# Altium PCB DSP6748_F.PcbDoc (part 9 of 16)
Units mil, origin at the board's own origin, x right, y up, seen from the top; angles counter-clockwise.
Board outline 8188.98 x 4055.12 mil, 4 copper layers (Top Layer, GND, VCC, Bottom Layer); 409 components, 262 nets, 1424 pads, 350 vias.
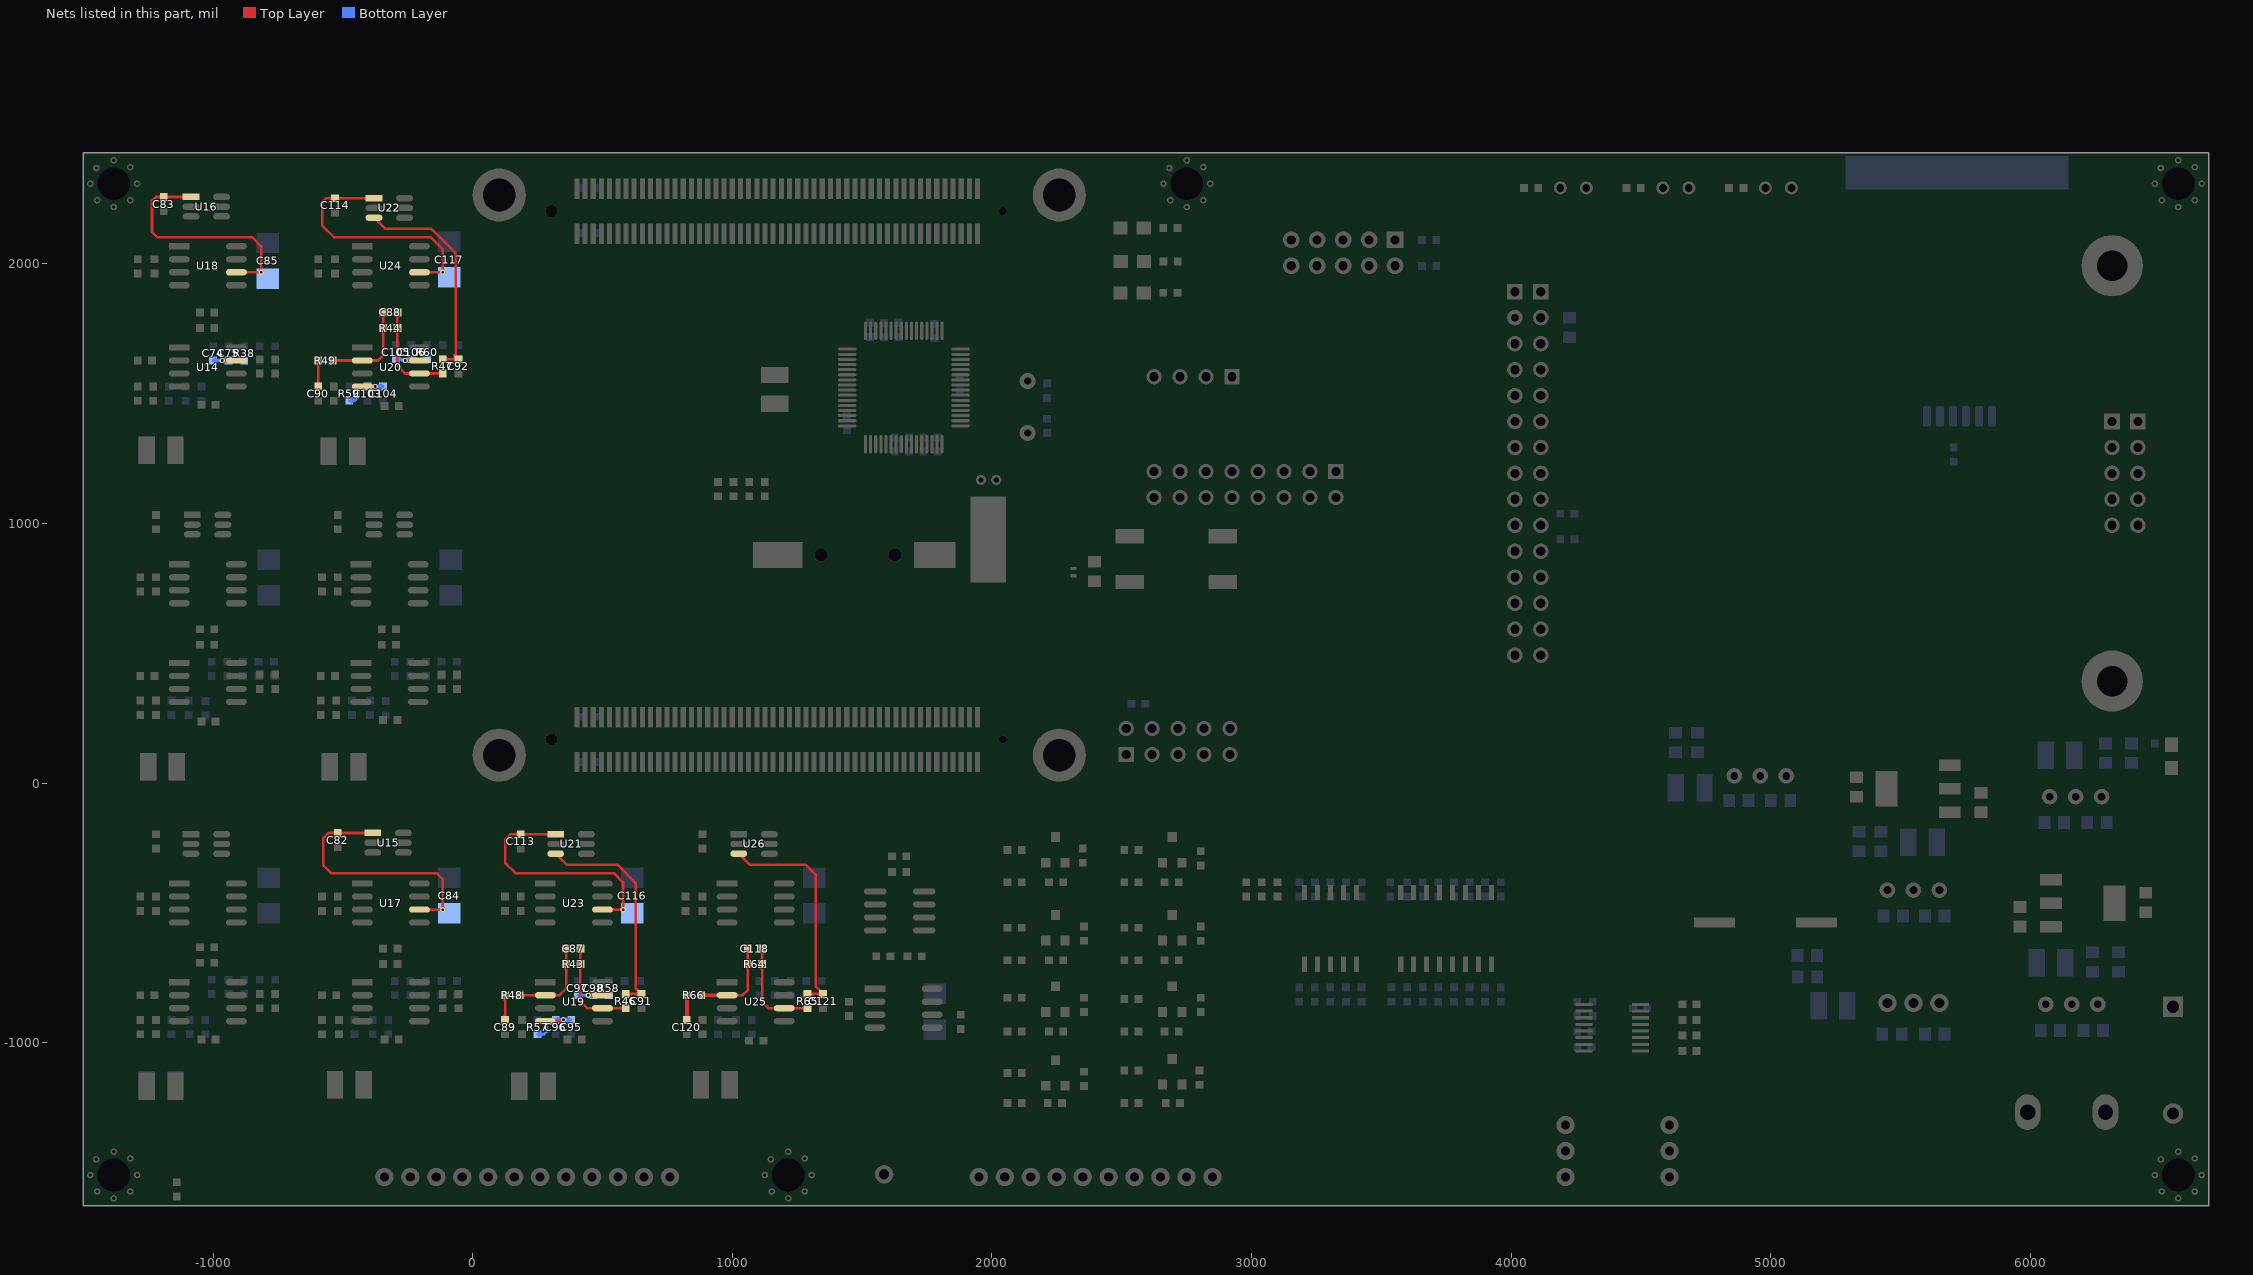
[diagram p11: the nets of this part, all layers, seen from the top]

## Via types
v1: diameter 21, hole 10, Top Layer to Bottom Layer, 244 vias
v2: diameter 20, hole 10, Top Layer to Bottom Layer, 84 vias
v3: diameter 32, hole 16, Top Layer to Bottom Layer, 11 vias
v4: diameter 24, hole 12, Top Layer to Bottom Layer, 7 vias
v5: diameter 39.37, hole 19.68, Top Layer to Bottom Layer, 3 vias
v6: diameter 30, hole 15, Top Layer to Bottom Layer, 1 vias

## Nets (pads, with @x,y where several pads share a name; then routed paths per layer and width w, separated by ;. In a path a pad name is that pad's centre, name@x,y a point inside that pad or via, vN(x,y) a via of type N, cw(c..) or ccw(c..) an arc to the next point about the centre after c; other vN are vias at no path point) (continued)
NetC74_2: C74.2 C75.2 R38.1 U14.7 | length 973.6
  Top Layer w10: v1@-964.19,1627.52 U14.7@-910.19,1627.52 ; v1@-961.3,1623.63 cw(c-951.91,1614.24) -951.91,1627.52 ; v1@-961.3,1623.63 cw(c-951.91,1614.24) -951.91,1627.52 ; v1@-961.3,1623.63 cw(c-951.91,1614.24) -951.91,1627.52 ; v1@-961.3,1631.41 ccw(c-951.91,1640.8) -951.91,1627.52 ; v1@-961.3,1631.41 ccw(c-951.91,1640.8) -951.91,1627.52 ; v1@-961.3,1631.41 ccw(c-951.91,1640.8) -951.91,1627.52 ; v1@-955.09,1627.52 cw(c-955.09,1610.62) U14.7@-943.14,1622.57 ; v1@-955.09,1627.52 ccw(c-955.09,1644.42) U14.7@-943.14,1632.47 ; v1@-955.09,1627.52 cw(c-955.09,1610.62) U14.7@-943.14,1622.57 ; v1@-955.09,1627.52 ccw(c-955.09,1644.42) U14.7@-943.14,1632.47 ; v1@-955.09,1627.52 ccw(c-955.09,1644.42) U14.7@-943.14,1632.47 ; v1@-955.09,1627.52 cw(c-955.09,1610.62) U14.7@-943.14,1622.57
  Bottom Layer w10: C74.2@-1000.19,1627.52 C75.2@-940.19,1627.52 R38.1@-880.19,1627.52 ; v1@-961.3,1623.63 cw(c-951.91,1614.24) -951.91,1627.52 cw(c-951.91,1640.8) v1@-961.3,1631.41 ; C74.2@-993.12,1620.45 cw(c-976.05,1603.38) -976.05,1627.52 ; C74.2@-993.12,1620.45 cw(c-976.05,1603.38) -976.05,1627.52 ; C74.2@-993.12,1620.45 cw(c-976.05,1603.38) -976.05,1627.52 ; C74.2@-993.12,1634.59 ccw(c-976.05,1651.66) -976.05,1627.52 ; C74.2@-993.12,1634.59 ccw(c-976.05,1651.66) -976.05,1627.52 ; C74.2@-993.12,1634.59 ccw(c-976.05,1651.66) -976.05,1627.52 ; -978.47,1627.52 cw(c-978.47,1614.24) v1@-969.08,1623.63 ; -978.47,1627.52 ccw(c-978.47,1640.8) v1@-969.08,1631.41 ; -978.47,1627.52 cw(c-978.47,1614.24) v1@-969.08,1623.63 ; -978.47,1627.52 ccw(c-978.47,1640.8) v1@-969.08,1631.41 ; -978.47,1627.52 ccw(c-978.47,1640.8) v1@-969.08,1631.41 ; -978.47,1627.52 cw(c-978.47,1614.24) v1@-969.08,1623.63 ; v1@-964.33,1627.52 cw(c-964.33,1603.38) C75.2@-947.26,1620.45 ; v1@-964.33,1627.52 ccw(c-964.33,1651.66) C75.2@-947.26,1634.59 ; v1@-964.33,1627.52 cw(c-964.33,1603.38) C75.2@-947.26,1620.45 ; v1@-964.33,1627.52 ccw(c-964.33,1651.66) C75.2@-947.26,1634.59 ; v1@-964.33,1627.52 ccw(c-964.33,1651.66) C75.2@-947.26,1634.59 ; v1@-964.33,1627.52 cw(c-964.33,1603.38) C75.2@-947.26,1620.45 ; v1@-962.22,1622.89 cw(c-955.74,1612.8) C75.2@-952.63,1624.38 ; v1@-962.22,1622.89 cw(c-955.74,1612.8) C75.2@-952.63,1624.38 ; v1@-962.22,1622.89 cw(c-955.74,1612.8) C75.2@-952.63,1624.38 ; v1@-962.22,1632.15 ccw(c-955.74,1642.24) C75.2@-952.63,1630.65 ; v1@-962.22,1632.15 ccw(c-955.74,1642.24) C75.2@-952.63,1630.65 ; v1@-962.22,1632.15 ccw(c-955.74,1642.24) C75.2@-952.63,1630.65 ; v1@-960.43,1624.77 cw(c-949.58,1618.51) C75.2@-952.82,1630.6 ; v1@-960.43,1624.77 cw(c-949.58,1618.51) C75.2@-952.82,1630.6 ; v1@-960.43,1624.77 cw(c-949.58,1618.51) C75.2@-952.82,1630.6 ; v1@-960.43,1630.27 ccw(c-949.58,1636.53) C75.2@-952.82,1624.44 ; v1@-960.43,1630.27 ccw(c-949.58,1636.53) C75.2@-952.82,1624.44 ; v1@-960.43,1630.27 ccw(c-949.58,1636.53) C75.2@-952.82,1624.44 ; C75.2@-933.12,1620.45 cw(c-916.05,1603.38) -916.05,1627.52 ; C75.2@-933.12,1620.45 cw(c-916.05,1603.38) -916.05,1627.52 ; C75.2@-933.12,1620.45 cw(c-916.05,1603.38) -916.05,1627.52 ; C75.2@-933.12,1634.59 ccw(c-916.05,1651.66) -916.05,1627.52 ; C75.2@-933.12,1634.59 ccw(c-916.05,1651.66) -916.05,1627.52 ; C75.2@-933.12,1634.59 ccw(c-916.05,1651.66) -916.05,1627.52 ; -904.33,1627.52 cw(c-904.33,1603.38) R38.1@-887.26,1620.45 ; -904.33,1627.52 ccw(c-904.33,1651.66) R38.1@-887.26,1634.59 ; -904.33,1627.52 cw(c-904.33,1603.38) R38.1@-887.26,1620.45 ; -904.33,1627.52 ccw(c-904.33,1651.66) R38.1@-887.26,1634.59 ; -904.33,1627.52 ccw(c-904.33,1651.66) R38.1@-887.26,1634.59 ; -904.33,1627.52 cw(c-904.33,1603.38) R38.1@-887.26,1620.45
  other v1: -965.19,1627.52
NetC82_2: C82.2 C84.1 U15.1 U17.6 | length 1508.7
  Top Layer w10: U15.1@-385.19,-192.48 C82.2@-520.19,-192.48 -555.19,-192.48 -575.19,-212.48 -575.19,-317.48 -545.19,-347.48 -140.19,-347.48 -115.19,-372.48 v1(-115.19,-487.48) U17.6@-205.19,-487.48 ; -544.33,-192.48 cw(c-544.33,-216.62) C82.2@-527.26,-199.55 ; -544.33,-192.48 ccw(c-544.33,-168.34) C82.2@-527.26,-185.41 ; -544.33,-192.48 cw(c-544.33,-216.62) C82.2@-527.26,-199.55 ; -544.33,-192.48 ccw(c-544.33,-168.34) C82.2@-527.26,-185.41 ; -544.33,-192.48 ccw(c-544.33,-168.34) C82.2@-527.26,-185.41 ; -544.33,-192.48 cw(c-544.33,-216.62) C82.2@-527.26,-199.55 ; C82.2@-513.12,-199.55 cw(c-496.05,-216.62) -496.05,-192.48 ; C82.2@-513.12,-199.55 cw(c-496.05,-216.62) -496.05,-192.48 ; C82.2@-513.12,-199.55 cw(c-496.05,-216.62) -496.05,-192.48 ; C82.2@-513.12,-185.41 ccw(c-496.05,-168.34) -496.05,-192.48 ; C82.2@-513.12,-185.41 ccw(c-496.05,-168.34) -496.05,-192.48 ; C82.2@-513.12,-185.41 ccw(c-496.05,-168.34) -496.05,-192.48 ; -423.3,-192.48 cw(c-423.3,-210.59) U15.1@-410.49,-197.78 ; -423.3,-192.48 ccw(c-423.3,-174.37) U15.1@-410.49,-187.18 ; -423.3,-192.48 cw(c-423.3,-210.59) U15.1@-410.49,-197.78 ; -423.3,-192.48 ccw(c-423.3,-174.37) U15.1@-410.49,-187.18 ; -423.3,-192.48 ccw(c-423.3,-174.37) U15.1@-410.49,-187.18 ; -423.3,-192.48 cw(c-423.3,-210.59) U15.1@-410.49,-197.78 ; U17.6@-172.24,-492.43 cw(c-160.29,-504.38) -160.29,-487.48 ; U17.6@-172.24,-492.43 cw(c-160.29,-504.38) -160.29,-487.48 ; U17.6@-172.24,-492.43 cw(c-160.29,-504.38) -160.29,-487.48 ; U17.6@-172.24,-482.53 ccw(c-160.29,-470.58) -160.29,-487.48 ; U17.6@-172.24,-482.53 ccw(c-160.29,-470.58) -160.29,-487.48 ; U17.6@-172.24,-482.53 ccw(c-160.29,-470.58) -160.29,-487.48 ; -128.47,-487.48 cw(c-128.47,-500.76) v1@-119.08,-491.37 ; -128.47,-487.48 ccw(c-128.47,-474.2) v1@-119.08,-483.59 ; -128.47,-487.48 cw(c-128.47,-500.76) v1@-119.08,-491.37 ; -128.47,-487.48 ccw(c-128.47,-474.2) v1@-119.08,-483.59 ; -128.47,-487.48 ccw(c-128.47,-474.2) v1@-119.08,-483.59 ; -128.47,-487.48 cw(c-128.47,-500.76) v1@-119.08,-491.37 ; v1@-119.08,-483.59 ccw(c-128.47,-474.2) -115.19,-474.2 ; v1@-119.08,-483.59 ccw(c-128.47,-474.2) -115.19,-474.2 ; v1@-119.08,-483.59 ccw(c-128.47,-474.2) -115.19,-474.2 ; -115.19,-474.2 ccw(c-101.91,-474.2) v1@-111.3,-483.59 ; -115.19,-474.2 ccw(c-101.91,-474.2) v1@-111.3,-483.59 ; -115.19,-474.2 ccw(c-101.91,-474.2) v1@-111.3,-483.59
NetC83_2: C83.2 C85.1 U16.1 U18.6 | length 1431.6
  Top Layer w10: U16.1@-1085.19,2257.52 C83.2@-1190.19,2257.52 -1220.19,2257.52 -1235.19,2242.52 -1235.19,2122.52 -1215.19,2102.52 -850.19,2102.52 -815.19,2067.52 v1(-815.19,1967.52) U18.6@-910.19,1967.52 ; -1214.33,2257.52 cw(c-1214.33,2233.38) C83.2@-1197.26,2250.45 ; -1214.33,2257.52 ccw(c-1214.33,2281.66) C83.2@-1197.26,2264.59 ; -1214.33,2257.52 cw(c-1214.33,2233.38) C83.2@-1197.26,2250.45 ; -1214.33,2257.52 ccw(c-1214.33,2281.66) C83.2@-1197.26,2264.59 ; -1214.33,2257.52 ccw(c-1214.33,2281.66) C83.2@-1197.26,2264.59 ; -1214.33,2257.52 cw(c-1214.33,2233.38) C83.2@-1197.26,2250.45 ; C83.2@-1183.12,2250.45 cw(c-1166.05,2233.38) -1166.05,2257.52 ; C83.2@-1183.12,2250.45 cw(c-1166.05,2233.38) -1166.05,2257.52 ; C83.2@-1183.12,2250.45 cw(c-1166.05,2233.38) -1166.05,2257.52 ; C83.2@-1183.12,2264.59 ccw(c-1166.05,2281.66) -1166.05,2257.52 ; C83.2@-1183.12,2264.59 ccw(c-1166.05,2281.66) -1166.05,2257.52 ; C83.2@-1183.12,2264.59 ccw(c-1166.05,2281.66) -1166.05,2257.52 ; -1123.3,2257.52 cw(c-1123.3,2239.41) U16.1@-1110.49,2252.22 ; -1123.3,2257.52 ccw(c-1123.3,2275.63) U16.1@-1110.49,2262.82 ; -1123.3,2257.52 cw(c-1123.3,2239.41) U16.1@-1110.49,2252.22 ; -1123.3,2257.52 ccw(c-1123.3,2275.63) U16.1@-1110.49,2262.82 ; -1123.3,2257.52 ccw(c-1123.3,2275.63) U16.1@-1110.49,2262.82 ; -1123.3,2257.52 cw(c-1123.3,2239.41) U16.1@-1110.49,2252.22 ; U18.6@-877.24,1962.57 cw(c-865.29,1950.62) -865.29,1967.52 ; U18.6@-877.24,1962.57 cw(c-865.29,1950.62) -865.29,1967.52 ; U18.6@-877.24,1962.57 cw(c-865.29,1950.62) -865.29,1967.52 ; U18.6@-877.24,1972.47 ccw(c-865.29,1984.42) -865.29,1967.52 ; U18.6@-877.24,1972.47 ccw(c-865.29,1984.42) -865.29,1967.52 ; U18.6@-877.24,1972.47 ccw(c-865.29,1984.42) -865.29,1967.52 ; -828.47,1967.52 cw(c-828.47,1954.24) v1@-819.08,1963.63 ; -828.47,1967.52 ccw(c-828.47,1980.8) v1@-819.08,1971.41 ; -828.47,1967.52 cw(c-828.47,1954.24) v1@-819.08,1963.63 ; -828.47,1967.52 ccw(c-828.47,1980.8) v1@-819.08,1971.41 ; -828.47,1967.52 ccw(c-828.47,1980.8) v1@-819.08,1971.41 ; -828.47,1967.52 cw(c-828.47,1954.24) v1@-819.08,1963.63 ; v1@-819.08,1971.41 ccw(c-828.47,1980.8) -815.19,1980.8 ; v1@-819.08,1971.41 ccw(c-828.47,1980.8) -815.19,1980.8 ; v1@-819.08,1971.41 ccw(c-828.47,1980.8) -815.19,1980.8 ; -815.19,1980.8 ccw(c-801.91,1980.8) v1@-811.3,1971.41 ; -815.19,1980.8 ccw(c-801.91,1980.8) v1@-811.3,1971.41 ; -815.19,1980.8 ccw(c-801.91,1980.8) v1@-811.3,1971.41
NetC87_1: C87.1 R43.2 R46.1 U19.6 | length 1004.7
  Top Layer w10: C87.1@414.81,-637.48 R43.2@414.81,-697.48 414.81,-842.48 439.81,-867.48 U19.6@499.81,-867.48 R46.1@589.81,-867.48 ; R43.2@407.74,-704.55 cw(c390.67,-721.62) 414.81,-721.62 ; R43.2@407.74,-704.55 cw(c390.67,-721.62) 414.81,-721.62 ; R43.2@407.74,-704.55 cw(c390.67,-721.62) 414.81,-721.62 ; R43.2@407.74,-690.41 ccw(c390.67,-673.34) 414.81,-673.34 ; R43.2@407.74,-690.41 ccw(c390.67,-673.34) 414.81,-673.34 ; R43.2@407.74,-690.41 ccw(c390.67,-673.34) 414.81,-673.34 ; C87.1@407.74,-644.55 cw(c390.67,-661.62) 414.81,-661.62 ; C87.1@407.74,-644.55 cw(c390.67,-661.62) 414.81,-661.62 ; C87.1@407.74,-644.55 cw(c390.67,-661.62) 414.81,-661.62 ; 414.81,-721.62 cw(c438.95,-721.62) R43.2@421.88,-704.55 ; 414.81,-721.62 cw(c438.95,-721.62) R43.2@421.88,-704.55 ; 414.81,-721.62 cw(c438.95,-721.62) R43.2@421.88,-704.55 ; 414.81,-673.34 ccw(c438.95,-673.34) R43.2@421.88,-690.41 ; 414.81,-673.34 ccw(c438.95,-673.34) R43.2@421.88,-690.41 ; 414.81,-673.34 ccw(c438.95,-673.34) R43.2@421.88,-690.41 ; 414.81,-661.62 cw(c438.95,-661.62) C87.1@421.88,-644.55 ; 414.81,-661.62 cw(c438.95,-661.62) C87.1@421.88,-644.55 ; 414.81,-661.62 cw(c438.95,-661.62) C87.1@421.88,-644.55 ; 454.91,-867.48 cw(c454.91,-884.38) U19.6@466.86,-872.43 ; 454.91,-867.48 ccw(c454.91,-850.58) U19.6@466.86,-862.53 ; 454.91,-867.48 cw(c454.91,-884.38) U19.6@466.86,-872.43 ; 454.91,-867.48 ccw(c454.91,-850.58) U19.6@466.86,-862.53 ; 454.91,-867.48 ccw(c454.91,-850.58) U19.6@466.86,-862.53 ; 454.91,-867.48 cw(c454.91,-884.38) U19.6@466.86,-872.43 ; U19.6@532.76,-872.43 cw(c544.71,-884.38) 544.71,-867.48 ; U19.6@532.76,-872.43 cw(c544.71,-884.38) 544.71,-867.48 ; U19.6@532.76,-872.43 cw(c544.71,-884.38) 544.71,-867.48 ; U19.6@532.76,-862.53 ccw(c544.71,-850.58) 544.71,-867.48 ; U19.6@532.76,-862.53 ccw(c544.71,-850.58) 544.71,-867.48 ; U19.6@532.76,-862.53 ccw(c544.71,-850.58) 544.71,-867.48 ; 565.67,-867.48 cw(c565.67,-891.62) R46.1@582.74,-874.55 ; 565.67,-867.48 ccw(c565.67,-843.34) R46.1@582.74,-860.41 ; 565.67,-867.48 cw(c565.67,-891.62) R46.1@582.74,-874.55 ; 565.67,-867.48 ccw(c565.67,-843.34) R46.1@582.74,-860.41 ; 565.67,-867.48 ccw(c565.67,-843.34) R46.1@582.74,-860.41 ; 565.67,-867.48 cw(c565.67,-891.62) R46.1@582.74,-874.55
NetC87_2: C87.2 R43.1 R48.2 U19.2 | length 959.7
  Top Layer w10: R48.2@179.81,-817.48 U19.2@279.81,-817.48 334.81,-817.48 359.81,-792.48 R43.1@359.81,-697.48 C87.2@359.81,-637.48 ; R48.2@186.88,-824.55 cw(c203.95,-841.62) 203.95,-817.48 ; R48.2@186.88,-824.55 cw(c203.95,-841.62) 203.95,-817.48 ; R48.2@186.88,-824.55 cw(c203.95,-841.62) 203.95,-817.48 ; R48.2@186.88,-810.41 ccw(c203.95,-793.34) 203.95,-817.48 ; R48.2@186.88,-810.41 ccw(c203.95,-793.34) 203.95,-817.48 ; R48.2@186.88,-810.41 ccw(c203.95,-793.34) 203.95,-817.48 ; 234.91,-817.48 cw(c234.91,-834.38) U19.2@246.86,-822.43 ; 234.91,-817.48 ccw(c234.91,-800.58) U19.2@246.86,-812.53 ; 234.91,-817.48 cw(c234.91,-834.38) U19.2@246.86,-822.43 ; 234.91,-817.48 ccw(c234.91,-800.58) U19.2@246.86,-812.53 ; 234.91,-817.48 ccw(c234.91,-800.58) U19.2@246.86,-812.53 ; 234.91,-817.48 cw(c234.91,-834.38) U19.2@246.86,-822.43 ; U19.2@312.76,-822.43 cw(c324.71,-834.38) 324.71,-817.48 ; U19.2@312.76,-822.43 cw(c324.71,-834.38) 324.71,-817.48 ; U19.2@312.76,-822.43 cw(c324.71,-834.38) 324.71,-817.48 ; U19.2@312.76,-812.53 ccw(c324.71,-800.58) 324.71,-817.48 ; U19.2@312.76,-812.53 ccw(c324.71,-800.58) 324.71,-817.48 ; U19.2@312.76,-812.53 ccw(c324.71,-800.58) 324.71,-817.48 ; R43.1@352.74,-704.55 cw(c335.67,-721.62) 359.81,-721.62 ; R43.1@352.74,-704.55 cw(c335.67,-721.62) 359.81,-721.62 ; R43.1@352.74,-704.55 cw(c335.67,-721.62) 359.81,-721.62 ; R43.1@352.74,-690.41 ccw(c335.67,-673.34) 359.81,-673.34 ; R43.1@352.74,-690.41 ccw(c335.67,-673.34) 359.81,-673.34 ; R43.1@352.74,-690.41 ccw(c335.67,-673.34) 359.81,-673.34 ; C87.2@352.74,-644.55 cw(c335.67,-661.62) 359.81,-661.62 ; C87.2@352.74,-644.55 cw(c335.67,-661.62) 359.81,-661.62 ; C87.2@352.74,-644.55 cw(c335.67,-661.62) 359.81,-661.62 ; 359.81,-721.62 cw(c383.95,-721.62) R43.1@366.88,-704.55 ; 359.81,-721.62 cw(c383.95,-721.62) R43.1@366.88,-704.55 ; 359.81,-721.62 cw(c383.95,-721.62) R43.1@366.88,-704.55 ; 359.81,-673.34 ccw(c383.95,-673.34) R43.1@366.88,-690.41 ; 359.81,-673.34 ccw(c383.95,-673.34) R43.1@366.88,-690.41 ; 359.81,-673.34 ccw(c383.95,-673.34) R43.1@366.88,-690.41 ; 359.81,-661.62 cw(c383.95,-661.62) C87.2@366.88,-644.55 ; 359.81,-661.62 cw(c383.95,-661.62) C87.2@366.88,-644.55 ; 359.81,-661.62 cw(c383.95,-661.62) C87.2@366.88,-644.55
NetC88_1: C88.1 R44.2 R47.1 U20.6 | length 1006.8
  Top Layer w10: C88.1@-290.19,1812.52 R44.2@-290.19,1752.52 -290.19,1607.52 -260.19,1577.52 U20.6@-205.19,1577.52 R47.1@-115.19,1577.52 ; R44.2@-297.26,1745.45 cw(c-314.33,1728.38) -290.19,1728.38 ; R44.2@-297.26,1745.45 cw(c-314.33,1728.38) -290.19,1728.38 ; R44.2@-297.26,1745.45 cw(c-314.33,1728.38) -290.19,1728.38 ; R44.2@-297.26,1759.59 ccw(c-314.33,1776.66) -290.19,1776.66 ; R44.2@-297.26,1759.59 ccw(c-314.33,1776.66) -290.19,1776.66 ; R44.2@-297.26,1759.59 ccw(c-314.33,1776.66) -290.19,1776.66 ; C88.1@-297.26,1805.45 cw(c-314.33,1788.38) -290.19,1788.38 ; C88.1@-297.26,1805.45 cw(c-314.33,1788.38) -290.19,1788.38 ; C88.1@-297.26,1805.45 cw(c-314.33,1788.38) -290.19,1788.38 ; -290.19,1728.38 cw(c-266.05,1728.38) R44.2@-283.12,1745.45 ; -290.19,1728.38 cw(c-266.05,1728.38) R44.2@-283.12,1745.45 ; -290.19,1728.38 cw(c-266.05,1728.38) R44.2@-283.12,1745.45 ; -290.19,1776.66 ccw(c-266.05,1776.66) R44.2@-283.12,1759.59 ; -290.19,1776.66 ccw(c-266.05,1776.66) R44.2@-283.12,1759.59 ; -290.19,1776.66 ccw(c-266.05,1776.66) R44.2@-283.12,1759.59 ; -290.19,1788.38 cw(c-266.05,1788.38) C88.1@-283.12,1805.45 ; -290.19,1788.38 cw(c-266.05,1788.38) C88.1@-283.12,1805.45 ; -290.19,1788.38 cw(c-266.05,1788.38) C88.1@-283.12,1805.45 ; -250.09,1577.52 cw(c-250.09,1560.62) U20.6@-238.14,1572.57 ; -250.09,1577.52 ccw(c-250.09,1594.42) U20.6@-238.14,1582.47 ; -250.09,1577.52 cw(c-250.09,1560.62) U20.6@-238.14,1572.57 ; -250.09,1577.52 ccw(c-250.09,1594.42) U20.6@-238.14,1582.47 ; -250.09,1577.52 ccw(c-250.09,1594.42) U20.6@-238.14,1582.47 ; -250.09,1577.52 cw(c-250.09,1560.62) U20.6@-238.14,1572.57 ; U20.6@-172.24,1572.57 cw(c-160.29,1560.62) -160.29,1577.52 ; U20.6@-172.24,1572.57 cw(c-160.29,1560.62) -160.29,1577.52 ; U20.6@-172.24,1572.57 cw(c-160.29,1560.62) -160.29,1577.52 ; U20.6@-172.24,1582.47 ccw(c-160.29,1594.42) -160.29,1577.52 ; U20.6@-172.24,1582.47 ccw(c-160.29,1594.42) -160.29,1577.52 ; U20.6@-172.24,1582.47 ccw(c-160.29,1594.42) -160.29,1577.52 ; -139.33,1577.52 cw(c-139.33,1553.38) R47.1@-122.26,1570.45 ; -139.33,1577.52 ccw(c-139.33,1601.66) R47.1@-122.26,1584.59 ; -139.33,1577.52 cw(c-139.33,1553.38) R47.1@-122.26,1570.45 ; -139.33,1577.52 ccw(c-139.33,1601.66) R47.1@-122.26,1584.59 ; -139.33,1577.52 ccw(c-139.33,1601.66) R47.1@-122.26,1584.59 ; -139.33,1577.52 cw(c-139.33,1553.38) R47.1@-122.26,1570.45
NetC88_2: C88.2 R44.1 R49.2 U20.2 | length 982.6
  Top Layer w10: R49.2@-540.19,1627.52 U20.2@-425.19,1627.52 -365.19,1627.52 -345.19,1647.52 R44.1@-345.19,1752.52 C88.2@-345.19,1812.52 ; R49.2@-533.12,1620.45 cw(c-516.05,1603.38) -516.05,1627.52 ; R49.2@-533.12,1620.45 cw(c-516.05,1603.38) -516.05,1627.52 ; R49.2@-533.12,1620.45 cw(c-516.05,1603.38) -516.05,1627.52 ; R49.2@-533.12,1634.59 ccw(c-516.05,1651.66) -516.05,1627.52 ; R49.2@-533.12,1634.59 ccw(c-516.05,1651.66) -516.05,1627.52 ; R49.2@-533.12,1634.59 ccw(c-516.05,1651.66) -516.05,1627.52 ; -470.09,1627.52 cw(c-470.09,1610.62) U20.2@-458.14,1622.57 ; -470.09,1627.52 ccw(c-470.09,1644.42) U20.2@-458.14,1632.47 ; -470.09,1627.52 cw(c-470.09,1610.62) U20.2@-458.14,1622.57 ; -470.09,1627.52 ccw(c-470.09,1644.42) U20.2@-458.14,1632.47 ; -470.09,1627.52 ccw(c-470.09,1644.42) U20.2@-458.14,1632.47 ; -470.09,1627.52 cw(c-470.09,1610.62) U20.2@-458.14,1622.57 ; U20.2@-392.24,1622.57 cw(c-380.29,1610.62) -380.29,1627.52 ; U20.2@-392.24,1622.57 cw(c-380.29,1610.62) -380.29,1627.52 ; U20.2@-392.24,1622.57 cw(c-380.29,1610.62) -380.29,1627.52 ; U20.2@-392.24,1632.47 ccw(c-380.29,1644.42) -380.29,1627.52 ; U20.2@-392.24,1632.47 ccw(c-380.29,1644.42) -380.29,1627.52 ; U20.2@-392.24,1632.47 ccw(c-380.29,1644.42) -380.29,1627.52 ; R44.1@-352.26,1745.45 cw(c-369.33,1728.38) -345.19,1728.38 ; R44.1@-352.26,1745.45 cw(c-369.33,1728.38) -345.19,1728.38 ; R44.1@-352.26,1745.45 cw(c-369.33,1728.38) -345.19,1728.38 ; R44.1@-352.26,1759.59 ccw(c-369.33,1776.66) -345.19,1776.66 ; R44.1@-352.26,1759.59 ccw(c-369.33,1776.66) -345.19,1776.66 ; R44.1@-352.26,1759.59 ccw(c-369.33,1776.66) -345.19,1776.66 ; C88.2@-352.26,1805.45 cw(c-369.33,1788.38) -345.19,1788.38 ; C88.2@-352.26,1805.45 cw(c-369.33,1788.38) -345.19,1788.38 ; C88.2@-352.26,1805.45 cw(c-369.33,1788.38) -345.19,1788.38 ; -345.19,1728.38 cw(c-321.05,1728.38) R44.1@-338.12,1745.45 ; -345.19,1728.38 cw(c-321.05,1728.38) R44.1@-338.12,1745.45 ; -345.19,1728.38 cw(c-321.05,1728.38) R44.1@-338.12,1745.45 ; -345.19,1776.66 ccw(c-321.05,1776.66) R44.1@-338.12,1759.59 ; -345.19,1776.66 ccw(c-321.05,1776.66) R44.1@-338.12,1759.59 ; -345.19,1776.66 ccw(c-321.05,1776.66) R44.1@-338.12,1759.59 ; -345.19,1788.38 cw(c-321.05,1788.38) C88.2@-338.12,1805.45 ; -345.19,1788.38 cw(c-321.05,1788.38) C88.2@-338.12,1805.45 ; -345.19,1788.38 cw(c-321.05,1788.38) C88.2@-338.12,1805.45
NetC89_2: C89.2 R48.1 | length 322.5
  Top Layer w10: C89.2@124.81,-912.48 R48.1@124.81,-817.48 ; C89.2@117.74,-905.41 ccw(c100.67,-888.34) 124.81,-888.34 ; C89.2@117.74,-905.41 ccw(c100.67,-888.34) 124.81,-888.34 ; C89.2@117.74,-905.41 ccw(c100.67,-888.34) 124.81,-888.34 ; R48.1@117.74,-824.55 cw(c100.67,-841.62) 124.81,-841.62 ; R48.1@117.74,-824.55 cw(c100.67,-841.62) 124.81,-841.62 ; R48.1@117.74,-824.55 cw(c100.67,-841.62) 124.81,-841.62 ; 124.81,-888.34 ccw(c148.95,-888.34) C89.2@131.88,-905.41 ; 124.81,-888.34 ccw(c148.95,-888.34) C89.2@131.88,-905.41 ; 124.81,-888.34 ccw(c148.95,-888.34) C89.2@131.88,-905.41 ; 124.81,-841.62 cw(c148.95,-841.62) R48.1@131.88,-824.55 ; 124.81,-841.62 cw(c148.95,-841.62) R48.1@131.88,-824.55 ; 124.81,-841.62 cw(c148.95,-841.62) R48.1@131.88,-824.55
NetC90_2: C90.2 R49.1 | length 327.5
  Top Layer w10: C90.2@-595.19,1527.52 R49.1@-595.19,1627.52 ; C90.2@-602.26,1534.59 ccw(c-619.33,1551.66) -595.19,1551.66 ; C90.2@-602.26,1534.59 ccw(c-619.33,1551.66) -595.19,1551.66 ; C90.2@-602.26,1534.59 ccw(c-619.33,1551.66) -595.19,1551.66 ; R49.1@-602.26,1620.45 cw(c-619.33,1603.38) -595.19,1603.38 ; R49.1@-602.26,1620.45 cw(c-619.33,1603.38) -595.19,1603.38 ; R49.1@-602.26,1620.45 cw(c-619.33,1603.38) -595.19,1603.38 ; -595.19,1551.66 ccw(c-571.05,1551.66) C90.2@-588.12,1534.59 ; -595.19,1551.66 ccw(c-571.05,1551.66) C90.2@-588.12,1534.59 ; -595.19,1551.66 ccw(c-571.05,1551.66) C90.2@-588.12,1534.59 ; -595.19,1603.38 cw(c-571.05,1603.38) R49.1@-588.12,1620.45 ; -595.19,1603.38 cw(c-571.05,1603.38) R49.1@-588.12,1620.45 ; -595.19,1603.38 cw(c-571.05,1603.38) R49.1@-588.12,1620.45
NetC91_2: C91.2 R46.2 U21.3 | length 1192.3
  Top Layer w10: U21.3@319.81,-272.28 362.21,-314.69 557.01,-314.69 628.76,-386.43 628.76,-791.43 C91.2@649.81,-812.48 R46.2@589.81,-812.48 ; R46.2@596.88,-819.55 cw(c613.95,-836.62) 613.95,-812.48 ; R46.2@596.88,-819.55 cw(c613.95,-836.62) 613.95,-812.48 ; R46.2@596.88,-819.55 cw(c613.95,-836.62) 613.95,-812.48 ; R46.2@596.88,-805.41 ccw(c613.95,-788.34) 613.95,-812.48 ; R46.2@596.88,-805.41 ccw(c613.95,-788.34) 613.95,-812.48 ; R46.2@596.88,-805.41 ccw(c613.95,-788.34) 613.95,-812.48 ; 625.67,-812.48 cw(c625.67,-836.62) C91.2@642.74,-819.55 ; 625.67,-812.48 ccw(c625.67,-788.34) C91.2@642.74,-805.41 ; 625.67,-812.48 cw(c625.67,-836.62) C91.2@642.74,-819.55 ; 625.67,-812.48 ccw(c625.67,-788.34) C91.2@642.74,-805.41 ; 625.67,-812.48 ccw(c625.67,-788.34) C91.2@642.74,-805.41 ; 625.67,-812.48 cw(c625.67,-836.62) C91.2@642.74,-819.55 ; 632.74,-795.41 cw(c615.67,-812.48) C91.2@639.81,-812.48 ; 632.74,-795.41 ccw(c649.81,-778.34) C91.2@649.81,-802.48 ; 632.74,-795.41 cw(c615.67,-812.48) C91.2@639.81,-812.48 ; 632.74,-795.41 ccw(c649.81,-778.34) C91.2@649.81,-802.48 ; 632.74,-795.41 ccw(c649.81,-778.34) C91.2@649.81,-802.48 ; 632.74,-795.41 cw(c615.67,-812.48) C91.2@639.81,-812.48
NetC92_2: C92.2 R47.2 U22.3 | length 1330.9
  Top Layer w10: U22.3@-380.19,2177.72 -337.79,2135.31 -160.31,2135.31 -65,2040 -65,1642.33 C92.2@-55.19,1632.52 ; R47.2@-115.19,1632.52 C92.2@-55.19,1632.52 ; R47.2@-108.12,1625.45 cw(c-91.05,1608.38) -91.05,1632.52 ; R47.2@-108.12,1625.45 cw(c-91.05,1608.38) -91.05,1632.52 ; R47.2@-108.12,1625.45 cw(c-91.05,1608.38) -91.05,1632.52 ; R47.2@-108.12,1639.59 ccw(c-91.05,1656.66) -91.05,1632.52 ; R47.2@-108.12,1639.59 ccw(c-91.05,1656.66) -91.05,1632.52 ; R47.2@-108.12,1639.59 ccw(c-91.05,1656.66) -91.05,1632.52 ; -79.33,1632.52 cw(c-79.33,1608.38) C92.2@-62.26,1625.45 ; -79.33,1632.52 ccw(c-79.33,1656.66) C92.2@-62.26,1639.59 ; -79.33,1632.52 cw(c-79.33,1608.38) C92.2@-62.26,1625.45 ; -79.33,1632.52 ccw(c-79.33,1656.66) C92.2@-62.26,1639.59 ; -79.33,1632.52 ccw(c-79.33,1656.66) C92.2@-62.26,1639.59 ; -79.33,1632.52 cw(c-79.33,1608.38) C92.2@-62.26,1625.45 ; -70.5,1647.83 cw(c-83.55,1634.79) -65.16,1633.32 ccw(c-83.55,1634.79) -70.5,1647.83 ; -70.5,1647.83 ccw(c-57.46,1660.88) -55.99,1642.49 cw(c-57.46,1660.88) -70.5,1647.83 ; -70.2,1647.52 ccw(c-57.99,1659.43) -56.22,1642.47 cw(c-57.99,1659.43) -70.2,1647.52 ; -70.2,1647.52 cw(c-83.07,1634.96) -65.15,1633.39 ccw(c-83.07,1634.96) -70.2,1647.52 ; -70.19,1647.53 ccw(c-57.63,1660.4) -56.06,1642.48 cw(c-57.63,1660.4) -70.19,1647.53 ; -70.19,1647.53 cw(c-82.11,1635.32) -65.14,1633.55 ccw(c-82.11,1635.32) -70.19,1647.53 ; C92.2@-55.19,1632.52 cw(c-53.48,1648.52) -68.64,1643.14 ccw(c-53.48,1648.52) C92.2@-55.19,1632.52 ; C92.2@-55.19,1632.52 ccw(c-71.19,1630.81) -65.81,1645.97 cw(c-71.19,1630.81) C92.2@-55.19,1632.52
NetC95_2: C95.2 C96.2 R57.2 U19.4 | length 1209.3
  Top Layer w10: U19.4@279.81,-917.48 344.81,-917.48 v1(349.81,-912.48) ; U19.4@312.76,-922.43 cw(c324.71,-934.38) 324.71,-917.48 ; U19.4@312.76,-922.43 cw(c324.71,-934.38) 324.71,-917.48 ; U19.4@312.76,-922.43 cw(c324.71,-934.38) 324.71,-917.48 ; U19.4@312.76,-912.53 ccw(c324.71,-900.58) 324.71,-917.48 ; U19.4@312.76,-912.53 ccw(c324.71,-900.58) 324.71,-917.48 ; U19.4@312.76,-912.53 ccw(c324.71,-900.58) 324.71,-917.48 ; 324.46,-917.48 ccw(c324.46,-887.13) v1@345.92,-908.59 ; 324.46,-917.48 ccw(c324.46,-887.13) v1@345.92,-908.59 ; 324.46,-917.48 ccw(c324.46,-887.13) v1@345.92,-908.59
  Bottom Layer w10: R57.2@249.81,-967.48 274.81,-967.48 284.81,-957.48 284.81,-929.48 ; 296.25,-918.04 cw(c312.53,-934.32) C96.2@319.81,-912.48 ; C96.2@311.32,-917.76 ccw(c301.81,-923.68) 301.81,-912.48 ; C96.2@311.32,-907.2 cw(c301.81,-901.28) 301.81,-912.48 ; C96.2@316.65,-921.97 ccw(c306.8,-951.47) 284.81,-929.48 ; C95.2@379.81,-912.48 v1(349.81,-912.48) C96.2@319.81,-912.48 ; R57.2@256.88,-974.55 cw(c273.95,-991.62) 273.95,-967.48 ; R57.2@256.88,-974.55 cw(c273.95,-991.62) 273.95,-967.48 ; R57.2@256.88,-974.55 cw(c273.95,-991.62) 273.95,-967.48 ; R57.2@256.88,-960.41 ccw(c273.95,-943.34) 273.95,-967.48 ; R57.2@256.88,-960.41 ccw(c273.95,-943.34) 273.95,-967.48 ; R57.2@256.88,-960.41 ccw(c273.95,-943.34) 273.95,-967.48 ; 284.81,-929.48 301.81,-912.48 ; 301.22,-915.98 ccw(c298.83,-903.32) 310.65,-908.48 cw(c298.83,-903.32) 301.22,-915.98 ; 301.22,-915.98 cw(c303.61,-928.65) 312.73,-919.54 ccw(c303.61,-928.65) 301.22,-915.98 ; 301.81,-912.48 C96.2@319.81,-912.48 ; C96.2@319.81,-912.48 ccw(c317.05,-948.92) 291.21,-923.08 cw(c317.05,-948.92) C96.2@319.81,-912.48 ; C96.2@326.88,-919.55 cw(c343.95,-936.62) v1@343.95,-912.48 ; C96.2@326.88,-919.55 cw(c343.95,-936.62) v1@343.95,-912.48 ; C96.2@326.88,-919.55 cw(c343.95,-936.62) v1@343.95,-912.48 ; C96.2@326.88,-905.41 ccw(c343.95,-888.34) v1@343.95,-912.48 ; C96.2@326.88,-905.41 ccw(c343.95,-888.34) v1@343.95,-912.48 ; C96.2@326.88,-905.41 ccw(c343.95,-888.34) v1@343.95,-912.48 ; C96.2@334.42,-915.03 cw(c338.35,-929.71) v1@346.76,-917.06 ; C96.2@334.42,-915.03 cw(c338.35,-929.71) v1@346.76,-917.06 ; C96.2@334.42,-915.03 cw(c338.35,-929.71) v1@346.76,-917.06 ; C96.2@334.42,-909.93 ccw(c338.35,-895.25) v1@346.76,-907.9 ; C96.2@334.42,-909.93 ccw(c338.35,-895.25) v1@346.76,-907.9 ; C96.2@334.42,-909.93 ccw(c338.35,-895.25) v1@346.76,-907.9 ; 336.53,-912.48 cw(c336.53,-925.76) v1@345.92,-916.37 ; 336.53,-912.48 ccw(c336.53,-899.2) v1@345.92,-908.59 ; 336.53,-912.48 cw(c336.53,-925.76) v1@345.92,-916.37 ; 336.53,-912.48 ccw(c336.53,-899.2) v1@345.92,-908.59 ; 336.53,-912.48 ccw(c336.53,-899.2) v1@345.92,-908.59 ; 336.53,-912.48 cw(c336.53,-925.76) v1@345.92,-916.37 ; v1@352.86,-917.06 cw(c361.27,-929.71) C95.2@365.2,-915.03 ; v1@352.86,-917.06 cw(c361.27,-929.71) C95.2@365.2,-915.03 ; v1@352.86,-917.06 cw(c361.27,-929.71) C95.2@365.2,-915.03 ; v1@352.86,-907.9 ccw(c361.27,-895.25) C95.2@365.2,-909.93 ; v1@352.86,-907.9 ccw(c361.27,-895.25) C95.2@365.2,-909.93 ; v1@352.86,-907.9 ccw(c361.27,-895.25) C95.2@365.2,-909.93 ; v1@353.7,-916.37 cw(c363.09,-925.76) 363.09,-912.48 ; v1@353.7,-916.37 cw(c363.09,-925.76) 363.09,-912.48 ; v1@353.7,-916.37 cw(c363.09,-925.76) 363.09,-912.48 ; v1@353.7,-908.59 ccw(c363.09,-899.2) 363.09,-912.48 ; v1@353.7,-908.59 ccw(c363.09,-899.2) 363.09,-912.48 ; v1@353.7,-908.59 ccw(c363.09,-899.2) 363.09,-912.48 ; v1@355.67,-912.48 cw(c355.67,-936.62) C95.2@372.74,-919.55 ; v1@355.67,-912.48 ccw(c355.67,-888.34) C95.2@372.74,-905.41 ; v1@355.67,-912.48 cw(c355.67,-936.62) C95.2@372.74,-919.55 ; v1@355.67,-912.48 ccw(c355.67,-888.34) C95.2@372.74,-905.41 ; v1@355.67,-912.48 ccw(c355.67,-888.34) C95.2@372.74,-905.41 ; v1@355.67,-912.48 cw(c355.67,-936.62) C95.2@372.74,-919.55
NetC97_2: C97.2 C98.2 R58.1 U19.7 | length 855.7
  Top Layer w10: v1(444.81,-817.48) U19.7@499.81,-817.48 ; v1@448.7,-821.37 cw(c458.09,-830.76) 458.09,-817.48 ; v1@448.7,-821.37 cw(c458.09,-830.76) 458.09,-817.48 ; v1@448.7,-821.37 cw(c458.09,-830.76) 458.09,-817.48 ; v1@448.7,-813.59 ccw(c458.09,-804.2) 458.09,-817.48 ; v1@448.7,-813.59 ccw(c458.09,-804.2) 458.09,-817.48 ; v1@448.7,-813.59 ccw(c458.09,-804.2) 458.09,-817.48 ; v1@454.91,-817.48 cw(c454.91,-834.38) U19.7@466.86,-822.43 ; v1@454.91,-817.48 ccw(c454.91,-800.58) U19.7@466.86,-812.53 ; v1@454.91,-817.48 cw(c454.91,-834.38) U19.7@466.86,-822.43 ; v1@454.91,-817.48 ccw(c454.91,-800.58) U19.7@466.86,-812.53 ; v1@454.91,-817.48 ccw(c454.91,-800.58) U19.7@466.86,-812.53 ; v1@454.91,-817.48 cw(c454.91,-834.38) U19.7@466.86,-822.43
  Bottom Layer w10: C97.2@404.81,-817.48 C98.2@464.81,-817.48 R58.1@524.81,-817.48 ; v1@448.7,-821.37 cw(c458.09,-830.76) 458.09,-817.48 cw(c458.09,-804.2) v1@448.7,-813.59 ; C97.2@411.88,-824.55 cw(c428.95,-841.62) 428.95,-817.48 ; C97.2@411.88,-824.55 cw(c428.95,-841.62) 428.95,-817.48 ; C97.2@411.88,-824.55 cw(c428.95,-841.62) 428.95,-817.48 ; C97.2@411.88,-810.41 ccw(c428.95,-793.34) 428.95,-817.48 ; C97.2@411.88,-810.41 ccw(c428.95,-793.34) 428.95,-817.48 ; C97.2@411.88,-810.41 ccw(c428.95,-793.34) 428.95,-817.48 ; 431.53,-817.48 cw(c431.53,-830.76) v1@440.92,-821.37 ; 431.53,-817.48 ccw(c431.53,-804.2) v1@440.92,-813.59 ; 431.53,-817.48 cw(c431.53,-830.76) v1@440.92,-821.37 ; 431.53,-817.48 ccw(c431.53,-804.2) v1@440.92,-813.59 ; 431.53,-817.48 ccw(c431.53,-804.2) v1@440.92,-813.59 ; 431.53,-817.48 cw(c431.53,-830.76) v1@440.92,-821.37 ; v1@440.67,-817.48 cw(c440.67,-841.62) C98.2@457.74,-824.55 ; v1@440.67,-817.48 ccw(c440.67,-793.34) C98.2@457.74,-810.41 ; v1@440.67,-817.48 cw(c440.67,-841.62) C98.2@457.74,-824.55 ; v1@440.67,-817.48 ccw(c440.67,-793.34) C98.2@457.74,-810.41 ; v1@440.67,-817.48 ccw(c440.67,-793.34) C98.2@457.74,-810.41 ; v1@440.67,-817.48 cw(c440.67,-841.62) C98.2@457.74,-824.55 ; C98.2@471.88,-824.55 cw(c488.95,-841.62) 488.95,-817.48 ; C98.2@471.88,-824.55 cw(c488.95,-841.62) 488.95,-817.48 ; C98.2@471.88,-824.55 cw(c488.95,-841.62) 488.95,-817.48 ; C98.2@471.88,-810.41 ccw(c488.95,-793.34) 488.95,-817.48 ; C98.2@471.88,-810.41 ccw(c488.95,-793.34) 488.95,-817.48 ; C98.2@471.88,-810.41 ccw(c488.95,-793.34) 488.95,-817.48 ; 500.67,-817.48 cw(c500.67,-841.62) R58.1@517.74,-824.55 ; 500.67,-817.48 ccw(c500.67,-793.34) R58.1@517.74,-810.41 ; 500.67,-817.48 cw(c500.67,-841.62) R58.1@517.74,-824.55 ; 500.67,-817.48 ccw(c500.67,-793.34) R58.1@517.74,-810.41 ; 500.67,-817.48 ccw(c500.67,-793.34) R58.1@517.74,-810.41 ; 500.67,-817.48 cw(c500.67,-841.62) R58.1@517.74,-824.55
NetC103_2: C103.2 C104.1 R59.2 U20.4 | length 1286.3
  Top Layer w10: U20.4@-425.19,1527.52 v1(-375.19,1527.52) ; U20.4@-392.24,1522.57 cw(c-380.29,1510.62) v1@-380.29,1527.52 ; U20.4@-392.24,1522.57 cw(c-380.29,1510.62) v1@-380.29,1527.52 ; U20.4@-392.24,1522.57 cw(c-380.29,1510.62) v1@-380.29,1527.52 ; U20.4@-392.24,1532.47 ccw(c-380.29,1544.42) v1@-380.29,1527.52 ; U20.4@-392.24,1532.47 ccw(c-380.29,1544.42) v1@-380.29,1527.52 ; U20.4@-392.24,1532.47 ccw(c-380.29,1544.42) v1@-380.29,1527.52 ; U20.4@-388.47,1527.52 cw(c-388.47,1514.24) v1@-379.08,1523.63 ; U20.4@-388.47,1527.52 ccw(c-388.47,1540.8) v1@-379.08,1531.41 ; U20.4@-388.47,1527.52 cw(c-388.47,1514.24) v1@-379.08,1523.63 ; U20.4@-388.47,1527.52 ccw(c-388.47,1540.8) v1@-379.08,1531.41 ; U20.4@-388.47,1527.52 ccw(c-388.47,1540.8) v1@-379.08,1531.41 ; U20.4@-388.47,1527.52 cw(c-388.47,1514.24) v1@-379.08,1523.63 ; U20.4@-386.53,1525.85 cw(c-384.61,1518.68) v1@-379.2,1523.76 ; U20.4@-386.53,1525.85 cw(c-384.61,1518.68) v1@-379.2,1523.76 ; U20.4@-386.53,1525.85 cw(c-384.61,1518.68) v1@-379.2,1523.76 ; U20.4@-386.53,1529.19 ccw(c-384.61,1536.36) v1@-379.2,1531.28 ; U20.4@-386.53,1529.19 ccw(c-384.61,1536.36) v1@-379.2,1531.28 ; U20.4@-386.53,1529.19 ccw(c-384.61,1536.36) v1@-379.2,1531.28
  Bottom Layer w10: C104.1@-345.19,1527.52 v1(-375.19,1527.52) C103.2@-405.19,1527.52 -428.19,1527.52 ; R59.2@-475.19,1472.52 ccw(c-466.27,1492.89) -450.55,1477.16 ; R59.2@-475.19,1472.52 ccw(c-466.27,1492.89) -450.55,1477.16 ; R59.2@-475.19,1472.52 ccw(c-466.27,1492.89) -450.55,1477.16 ; R59.2@-475.19,1472.52 -455.19,1472.52 ; R59.2@-471.18,1481.68 ccw(c-459.96,1507.29) -440.19,1487.52 ; R59.2@-471.18,1481.68 ccw(c-459.96,1507.29) -440.19,1487.52 ; R59.2@-471.18,1481.68 ccw(c-459.96,1507.29) -440.19,1487.52 ; R59.2@-467.19,1466.52 cw(c-455.19,1457.52) -455.19,1472.52 ; R59.2@-467.19,1466.52 cw(c-455.19,1457.52) -455.19,1472.52 ; R59.2@-467.19,1466.52 cw(c-455.19,1457.52) -455.19,1472.52 ; R59.2@-467.19,1478.52 ccw(c-455.19,1487.52) -455.19,1472.52 ; R59.2@-467.19,1478.52 ccw(c-455.19,1487.52) -455.19,1472.52 ; R59.2@-467.19,1478.52 ccw(c-455.19,1487.52) -455.19,1472.52 ; -455.19,1472.52 -440.19,1487.52 ; -440.19,1487.52 -440.19,1515.52 -428.19,1527.52 ; -428.19,1527.52 cw(c-428.19,1506.07) C103.2@-412.5,1520.7 ; -428.19,1527.52 ccw(c-428.19,1548.97) C103.2@-412.5,1534.34 ; -428.19,1527.52 cw(c-428.19,1506.07) C103.2@-412.5,1520.7 ; -428.19,1527.52 ccw(c-428.19,1548.97) C103.2@-412.5,1534.34 ; -428.19,1527.52 ccw(c-428.19,1548.97) C103.2@-412.5,1534.34 ; -428.19,1527.52 cw(c-428.19,1506.07) C103.2@-412.5,1520.7 ; C103.2@-398.12,1520.45 cw(c-381.05,1503.38) v1@-381.05,1527.52 ; C103.2@-398.12,1520.45 cw(c-381.05,1503.38) v1@-381.05,1527.52 ; C103.2@-398.12,1520.45 cw(c-381.05,1503.38) v1@-381.05,1527.52 ; C103.2@-398.12,1534.59 ccw(c-381.05,1551.66) v1@-381.05,1527.52 ; C103.2@-398.12,1534.59 ccw(c-381.05,1551.66) v1@-381.05,1527.52 ; C103.2@-398.12,1534.59 ccw(c-381.05,1551.66) v1@-381.05,1527.52 ; C103.2@-390.58,1524.97 cw(c-386.65,1510.29) v1@-378.24,1522.94 ; C103.2@-390.58,1524.97 cw(c-386.65,1510.29) v1@-378.24,1522.94 ; C103.2@-390.58,1524.97 cw(c-386.65,1510.29) v1@-378.24,1522.94 ; C103.2@-390.58,1530.07 ccw(c-386.65,1544.75) v1@-378.24,1532.1 ; C103.2@-390.58,1530.07 ccw(c-386.65,1544.75) v1@-378.24,1532.1 ; C103.2@-390.58,1530.07 ccw(c-386.65,1544.75) v1@-378.24,1532.1 ; -388.47,1527.52 cw(c-388.47,1514.24) v1@-379.08,1523.63 ; -388.47,1527.52 ccw(c-388.47,1540.8) v1@-379.08,1531.41 ; -388.47,1527.52 cw(c-388.47,1514.24) v1@-379.08,1523.63 ; -388.47,1527.52 ccw(c-388.47,1540.8) v1@-379.08,1531.41 ; -388.47,1527.52 ccw(c-388.47,1540.8) v1@-379.08,1531.41 ; -388.47,1527.52 cw(c-388.47,1514.24) v1@-379.08,1523.63 ; v1@-372.14,1522.94 cw(c-363.73,1510.29) C104.1@-359.8,1524.97 ; v1@-372.14,1522.94 cw(c-363.73,1510.29) C104.1@-359.8,1524.97 ; v1@-372.14,1522.94 cw(c-363.73,1510.29) C104.1@-359.8,1524.97 ; v1@-372.14,1532.1 ccw(c-363.73,1544.75) C104.1@-359.8,1530.07 ; v1@-372.14,1532.1 ccw(c-363.73,1544.75) C104.1@-359.8,1530.07 ; v1@-372.14,1532.1 ccw(c-363.73,1544.75) C104.1@-359.8,1530.07 ; v1@-371.3,1523.63 cw(c-361.91,1514.24) -361.91,1527.52 ; v1@-371.3,1523.63 cw(c-361.91,1514.24) -361.91,1527.52 ; v1@-371.3,1523.63 cw(c-361.91,1514.24) -361.91,1527.52 ; v1@-371.3,1531.41 ccw(c-361.91,1540.8) -361.91,1527.52 ; v1@-371.3,1531.41 ccw(c-361.91,1540.8) -361.91,1527.52 ; v1@-371.3,1531.41 ccw(c-361.91,1540.8) -361.91,1527.52 ; v1@-369.33,1527.52 cw(c-369.33,1503.38) C104.1@-352.26,1520.45 ; v1@-369.33,1527.52 ccw(c-369.33,1551.66) C104.1@-352.26,1534.59 ; v1@-369.33,1527.52 cw(c-369.33,1503.38) C104.1@-352.26,1520.45 ; v1@-369.33,1527.52 ccw(c-369.33,1551.66) C104.1@-352.26,1534.59 ; v1@-369.33,1527.52 ccw(c-369.33,1551.66) C104.1@-352.26,1534.59 ; v1@-369.33,1527.52 cw(c-369.33,1503.38) C104.1@-352.26,1520.45
NetC105_2: C105.2 C106.2 R60.1 U20.7 | length 1005.6
  Top Layer w10: v1(-259.19,1627.52) U20.7@-205.19,1627.52 ; v1@-255.3,1623.63 cw(c-245.91,1614.24) -245.91,1627.52 ; v1@-255.3,1623.63 cw(c-245.91,1614.24) -245.91,1627.52 ; v1@-255.3,1623.63 cw(c-245.91,1614.24) -245.91,1627.52 ; v1@-255.3,1631.41 ccw(c-245.91,1640.8) -245.91,1627.52 ; v1@-255.3,1631.41 ccw(c-245.91,1640.8) -245.91,1627.52 ; v1@-255.3,1631.41 ccw(c-245.91,1640.8) -245.91,1627.52 ; v1@-255.26,1623.67 cw(c-248.16,1616.69) -245.58,1626.31 ; v1@-255.26,1623.67 cw(c-248.16,1616.69) -245.58,1626.31 ; v1@-255.26,1623.67 cw(c-248.16,1616.69) -245.58,1626.31 ; v1@-255.26,1631.37 ccw(c-248.16,1638.34) -245.58,1628.73 ; v1@-255.26,1631.37 ccw(c-248.16,1638.34) -245.58,1628.73 ; v1@-255.26,1631.37 ccw(c-248.16,1638.34) -245.58,1628.73 ; v1@-250.09,1627.52 cw(c-250.09,1610.62) U20.7@-238.14,1622.57 ; v1@-250.09,1627.52 ccw(c-250.09,1644.42) U20.7@-238.14,1632.47 ; v1@-250.09,1627.52 cw(c-250.09,1610.62) U20.7@-238.14,1622.57 ; v1@-250.09,1627.52 ccw(c-250.09,1644.42) U20.7@-238.14,1632.47 ; v1@-250.09,1627.52 ccw(c-250.09,1644.42) U20.7@-238.14,1632.47 ; v1@-250.09,1627.52 cw(c-250.09,1610.62) U20.7@-238.14,1622.57
  Bottom Layer w10: C105.2@-295.19,1632.52 C106.2@-235.19,1632.52 ; v1@-255.15,1623.79 cw(c-235.19,1605.34) C106.2@-235.19,1632.52 ; R60.1@-175.19,1632.52 C106.2@-235.19,1632.52 ; C105.2@-288.12,1625.45 cw(c-271.05,1608.38) -271.05,1632.52 ; C105.2@-288.12,1625.45 cw(c-271.05,1608.38) -271.05,1632.52 ; C105.2@-288.12,1625.45 cw(c-271.05,1608.38) -271.05,1632.52 ; C105.2@-288.12,1639.59 ccw(c-271.05,1656.66) -271.05,1632.52 ; C105.2@-288.12,1639.59 ccw(c-271.05,1656.66) -271.05,1632.52 ; C105.2@-288.12,1639.59 ccw(c-271.05,1656.66) -271.05,1632.52 ; C105.2@-284.54,1632.52 cw(c-284.54,1602.17) v1@-263.08,1623.63 ; C105.2@-284.54,1632.52 cw(c-284.54,1602.17) v1@-263.08,1623.63 ; C105.2@-284.54,1632.52 cw(c-284.54,1602.17) v1@-263.08,1623.63 ; v1@-259.33,1632.52 cw(c-259.33,1608.38) C106.2@-242.26,1625.45 ; v1@-259.33,1632.52 ccw(c-259.33,1656.66) C106.2@-242.26,1639.59 ; v1@-259.33,1632.52 cw(c-259.33,1608.38) C106.2@-242.26,1625.45 ; v1@-259.33,1632.52 ccw(c-259.33,1656.66) C106.2@-242.26,1639.59 ; v1@-259.33,1632.52 ccw(c-259.33,1656.66) C106.2@-242.26,1639.59 ; v1@-259.33,1632.52 cw(c-259.33,1608.38) C106.2@-242.26,1625.45 ; C106.2@-228.12,1625.45 cw(c-211.05,1608.38) -211.05,1632.52 ; C106.2@-228.12,1625.45 cw(c-211.05,1608.38) -211.05,1632.52 ; C106.2@-228.12,1625.45 cw(c-211.05,1608.38) -211.05,1632.52 ; C106.2@-228.12,1639.59 ccw(c-211.05,1656.66) -211.05,1632.52 ; C106.2@-228.12,1639.59 ccw(c-211.05,1656.66) -211.05,1632.52 ; C106.2@-228.12,1639.59 ccw(c-211.05,1656.66) -211.05,1632.52 ; -199.33,1632.52 cw(c-199.33,1608.38) R60.1@-182.26,1625.45 ; -199.33,1632.52 ccw(c-199.33,1656.66) R60.1@-182.26,1639.59 ; -199.33,1632.52 cw(c-199.33,1608.38) R60.1@-182.26,1625.45 ; -199.33,1632.52 ccw(c-199.33,1656.66) R60.1@-182.26,1639.59 ; -199.33,1632.52 ccw(c-199.33,1656.66) R60.1@-182.26,1639.59 ; -199.33,1632.52 cw(c-199.33,1608.38) R60.1@-182.26,1625.45 ; C105.2@-287.87,1625.7 cw(c-277.61,1616.14) -273.98,1629.69 ccw(c-277.61,1616.14) C105.2@-287.87,1625.7 ; C105.2@-286.53,1637.52 ccw(c-273.77,1644.89) -277.59,1630.66 cw(c-273.77,1644.89) C105.2@-286.53,1637.52 ; -274.03,1629.95 ccw(c-269.5,1637.79) -263.09,1631.4 cw(c-269.5,1637.79) -274.03,1629.95
NetC113_2: C113.2 C116.1 U21.1 U23.6 | length 1482
  Top Layer w10: U21.1@319.81,-197.48 C113.2@184.81,-197.48 144.81,-197.48 124.81,-217.48 124.81,-307.48 164.81,-347.48 544.81,-347.48 579.81,-382.48 v1(579.81,-487.48) U23.6@499.81,-487.48 ; 160.67,-197.48 cw(c160.67,-221.62) C113.2@177.74,-204.55 ; 160.67,-197.48 ccw(c160.67,-173.34) C113.2@177.74,-190.41 ; 160.67,-197.48 cw(c160.67,-221.62) C113.2@177.74,-204.55 ; 160.67,-197.48 ccw(c160.67,-173.34) C113.2@177.74,-190.41 ; 160.67,-197.48 ccw(c160.67,-173.34) C113.2@177.74,-190.41 ; 160.67,-197.48 cw(c160.67,-221.62) C113.2@177.74,-204.55 ; C113.2@191.88,-204.55 cw(c208.95,-221.62) 208.95,-197.48 ; C113.2@191.88,-204.55 cw(c208.95,-221.62) 208.95,-197.48 ; C113.2@191.88,-204.55 cw(c208.95,-221.62) 208.95,-197.48 ; C113.2@191.88,-190.41 ccw(c208.95,-173.34) 208.95,-197.48 ; C113.2@191.88,-190.41 ccw(c208.95,-173.34) 208.95,-197.48 ; C113.2@191.88,-190.41 ccw(c208.95,-173.34) 208.95,-197.48 ; 281.7,-197.48 cw(c281.7,-215.59) U21.1@294.51,-202.78 ; 281.7,-197.48 ccw(c281.7,-179.37) U21.1@294.51,-192.18 ; 281.7,-197.48 cw(c281.7,-215.59) U21.1@294.51,-202.78 ; 281.7,-197.48 ccw(c281.7,-179.37) U21.1@294.51,-192.18 ; 281.7,-197.48 ccw(c281.7,-179.37) U21.1@294.51,-192.18 ; 281.7,-197.48 cw(c281.7,-215.59) U21.1@294.51,-202.78 ; U23.6@532.76,-492.43 cw(c544.71,-504.38) 544.71,-487.48 ; U23.6@532.76,-492.43 cw(c544.71,-504.38) 544.71,-487.48 ; U23.6@532.76,-492.43 cw(c544.71,-504.38) 544.71,-487.48 ; U23.6@532.76,-482.53 ccw(c544.71,-470.58) 544.71,-487.48 ; U23.6@532.76,-482.53 ccw(c544.71,-470.58) 544.71,-487.48 ; U23.6@532.76,-482.53 ccw(c544.71,-470.58) 544.71,-487.48 ; 566.53,-487.48 cw(c566.53,-500.76) v1@575.92,-491.37 ; 566.53,-487.48 ccw(c566.53,-474.2) v1@575.92,-483.59 ; 566.53,-487.48 cw(c566.53,-500.76) v1@575.92,-491.37 ; 566.53,-487.48 ccw(c566.53,-474.2) v1@575.92,-483.59 ; 566.53,-487.48 ccw(c566.53,-474.2) v1@575.92,-483.59 ; 566.53,-487.48 cw(c566.53,-500.76) v1@575.92,-491.37 ; v1@575.92,-483.59 ccw(c566.53,-474.2) 579.81,-474.2 ; v1@575.92,-483.59 ccw(c566.53,-474.2) 579.81,-474.2 ; v1@575.92,-483.59 ccw(c566.53,-474.2) 579.81,-474.2 ; 579.81,-474.2 ccw(c593.09,-474.2) v1@583.7,-483.59 ; 579.81,-474.2 ccw(c593.09,-474.2) v1@583.7,-483.59 ; 579.81,-474.2 ccw(c593.09,-474.2) v1@583.7,-483.59
NetC114_2: C114.2 C117.1 U22.1 U24.6 | length 1494.8
  Top Layer w10: U22.1@-380.19,2252.52 C114.2@-530.19,2252.52 -565.19,2252.52 -580.19,2237.52 -580.19,2147.52 -535.19,2102.52 -162.52,2102.52 -115.19,2055.19 v1(-115.19,1967.52) U24.6@-205.19,1967.52 ; -554.33,2252.52 cw(c-554.33,2228.38) C114.2@-537.26,2245.45 ; -554.33,2252.52 ccw(c-554.33,2276.66) C114.2@-537.26,2259.59 ; -554.33,2252.52 cw(c-554.33,2228.38) C114.2@-537.26,2245.45 ; -554.33,2252.52 ccw(c-554.33,2276.66) C114.2@-537.26,2259.59 ; -554.33,2252.52 ccw(c-554.33,2276.66) C114.2@-537.26,2259.59 ; -554.33,2252.52 cw(c-554.33,2228.38) C114.2@-537.26,2245.45 ; C114.2@-523.12,2245.45 cw(c-506.05,2228.38) -506.05,2252.52 ; C114.2@-523.12,2245.45 cw(c-506.05,2228.38) -506.05,2252.52 ; C114.2@-523.12,2245.45 cw(c-506.05,2228.38) -506.05,2252.52 ; C114.2@-523.12,2259.59 ccw(c-506.05,2276.66) -506.05,2252.52 ; C114.2@-523.12,2259.59 ccw(c-506.05,2276.66) -506.05,2252.52 ; C114.2@-523.12,2259.59 ccw(c-506.05,2276.66) -506.05,2252.52 ; -418.3,2252.52 cw(c-418.3,2234.41) U22.1@-405.49,2247.22 ; -418.3,2252.52 ccw(c-418.3,2270.63) U22.1@-405.49,2257.82 ; -418.3,2252.52 cw(c-418.3,2234.41) U22.1@-405.49,2247.22 ; -418.3,2252.52 ccw(c-418.3,2270.63) U22.1@-405.49,2257.82 ; -418.3,2252.52 ccw(c-418.3,2270.63) U22.1@-405.49,2257.82 ; -418.3,2252.52 cw(c-418.3,2234.41) U22.1@-405.49,2247.22 ; U24.6@-172.24,1962.57 cw(c-160.29,1950.62) -160.29,1967.52 ; U24.6@-172.24,1962.57 cw(c-160.29,1950.62) -160.29,1967.52 ; U24.6@-172.24,1962.57 cw(c-160.29,1950.62) -160.29,1967.52 ; U24.6@-172.24,1972.47 ccw(c-160.29,1984.42) -160.29,1967.52 ; U24.6@-172.24,1972.47 ccw(c-160.29,1984.42) -160.29,1967.52 ; U24.6@-172.24,1972.47 ccw(c-160.29,1984.42) -160.29,1967.52 ; -128.47,1967.52 cw(c-128.47,1954.24) v1@-119.08,1963.63 ; -128.47,1967.52 ccw(c-128.47,1980.8) v1@-119.08,1971.41 ; -128.47,1967.52 cw(c-128.47,1954.24) v1@-119.08,1963.63 ; -128.47,1967.52 ccw(c-128.47,1980.8) v1@-119.08,1971.41 ; -128.47,1967.52 ccw(c-128.47,1980.8) v1@-119.08,1971.41 ; -128.47,1967.52 cw(c-128.47,1954.24) v1@-119.08,1963.63 ; v1@-119.08,1971.41 ccw(c-128.47,1980.8) -115.19,1980.8 ; v1@-119.08,1971.41 ccw(c-128.47,1980.8) -115.19,1980.8 ; v1@-119.08,1971.41 ccw(c-128.47,1980.8) -115.19,1980.8 ; -115.19,1980.8 ccw(c-101.91,1980.8) v1@-111.3,1971.41 ; -115.19,1980.8 ccw(c-101.91,1980.8) v1@-111.3,1971.41 ; -115.19,1980.8 ccw(c-101.91,1980.8) v1@-111.3,1971.41
NetC118_1: C118.1 R64.2 R65.1 U25.6 | length 1004.7
  Top Layer w10: C118.1@1114.81,-637.48 R64.2@1114.81,-697.48 1114.81,-842.48 1139.81,-867.48 U25.6@1199.81,-867.48 R65.1@1289.81,-867.48 ; R64.2@1107.74,-704.55 cw(c1090.67,-721.62) 1114.81,-721.62 ; R64.2@1107.74,-704.55 cw(c1090.67,-721.62) 1114.81,-721.62 ; R64.2@1107.74,-704.55 cw(c1090.67,-721.62) 1114.81,-721.62 ; R64.2@1107.74,-690.41 ccw(c1090.67,-673.34) 1114.81,-673.34 ; R64.2@1107.74,-690.41 ccw(c1090.67,-673.34) 1114.81,-673.34 ; R64.2@1107.74,-690.41 ccw(c1090.67,-673.34) 1114.81,-673.34 ; C118.1@1107.74,-644.55 cw(c1090.67,-661.62) 1114.81,-661.62 ; C118.1@1107.74,-644.55 cw(c1090.67,-661.62) 1114.81,-661.62 ; C118.1@1107.74,-644.55 cw(c1090.67,-661.62) 1114.81,-661.62 ; 1114.81,-721.62 cw(c1138.95,-721.62) R64.2@1121.88,-704.55 ; 1114.81,-721.62 cw(c1138.95,-721.62) R64.2@1121.88,-704.55 ; 1114.81,-721.62 cw(c1138.95,-721.62) R64.2@1121.88,-704.55 ; 1114.81,-673.34 ccw(c1138.95,-673.34) R64.2@1121.88,-690.41 ; 1114.81,-673.34 ccw(c1138.95,-673.34) R64.2@1121.88,-690.41 ; 1114.81,-673.34 ccw(c1138.95,-673.34) R64.2@1121.88,-690.41 ; 1114.81,-661.62 cw(c1138.95,-661.62) C118.1@1121.88,-644.55 ; 1114.81,-661.62 cw(c1138.95,-661.62) C118.1@1121.88,-644.55 ; 1114.81,-661.62 cw(c1138.95,-661.62) C118.1@1121.88,-644.55 ; 1154.91,-867.48 cw(c1154.91,-884.38) U25.6@1166.86,-872.43 ; 1154.91,-867.48 ccw(c1154.91,-850.58) U25.6@1166.86,-862.53 ; 1154.91,-867.48 cw(c1154.91,-884.38) U25.6@1166.86,-872.43 ; 1154.91,-867.48 ccw(c1154.91,-850.58) U25.6@1166.86,-862.53 ; 1154.91,-867.48 ccw(c1154.91,-850.58) U25.6@1166.86,-862.53 ; 1154.91,-867.48 cw(c1154.91,-884.38) U25.6@1166.86,-872.43 ; U25.6@1232.76,-872.43 cw(c1244.71,-884.38) 1244.71,-867.48 ; U25.6@1232.76,-872.43 cw(c1244.71,-884.38) 1244.71,-867.48 ; U25.6@1232.76,-872.43 cw(c1244.71,-884.38) 1244.71,-867.48 ; U25.6@1232.76,-862.53 ccw(c1244.71,-850.58) 1244.71,-867.48 ; U25.6@1232.76,-862.53 ccw(c1244.71,-850.58) 1244.71,-867.48 ; U25.6@1232.76,-862.53 ccw(c1244.71,-850.58) 1244.71,-867.48 ; 1265.67,-867.48 cw(c1265.67,-891.62) R65.1@1282.74,-874.55 ; 1265.67,-867.48 ccw(c1265.67,-843.34) R65.1@1282.74,-860.41 ; 1265.67,-867.48 cw(c1265.67,-891.62) R65.1@1282.74,-874.55 ; 1265.67,-867.48 ccw(c1265.67,-843.34) R65.1@1282.74,-860.41 ; 1265.67,-867.48 ccw(c1265.67,-843.34) R65.1@1282.74,-860.41 ; 1265.67,-867.48 cw(c1265.67,-891.62) R65.1@1282.74,-874.55
NetC118_2: C118.2 R64.1 R66.2 U25.2 | length 854.5
  Top Layer w10: U25.2@979.81,-817.48 1039.81,-817.48 1059.81,-797.48 R64.1@1059.81,-697.48 C118.2@1059.81,-637.48 ; U25.2@1012.76,-822.43 cw(c1024.71,-834.38) 1024.71,-817.48 ; U25.2@1012.76,-822.43 cw(c1024.71,-834.38) 1024.71,-817.48 ; U25.2@1012.76,-822.43 cw(c1024.71,-834.38) 1024.71,-817.48 ; U25.2@1012.76,-812.53 ccw(c1024.71,-800.58) 1024.71,-817.48 ; U25.2@1012.76,-812.53 ccw(c1024.71,-800.58) 1024.71,-817.48 ; U25.2@1012.76,-812.53 ccw(c1024.71,-800.58) 1024.71,-817.48 ; R64.1@1052.74,-704.55 cw(c1035.67,-721.62) 1059.81,-721.62 ; R64.1@1052.74,-704.55 cw(c1035.67,-721.62) 1059.81,-721.62 ; R64.1@1052.74,-704.55 cw(c1035.67,-721.62) 1059.81,-721.62 ; R64.1@1052.74,-690.41 ccw(c1035.67,-673.34) 1059.81,-673.34 ; R64.1@1052.74,-690.41 ccw(c1035.67,-673.34) 1059.81,-673.34 ; R64.1@1052.74,-690.41 ccw(c1035.67,-673.34) 1059.81,-673.34 ; C118.2@1052.74,-644.55 cw(c1035.67,-661.62) 1059.81,-661.62 ; C118.2@1052.74,-644.55 cw(c1035.67,-661.62) 1059.81,-661.62 ; C118.2@1052.74,-644.55 cw(c1035.67,-661.62) 1059.81,-661.62 ; 1059.81,-721.62 cw(c1083.95,-721.62) R64.1@1066.88,-704.55 ; 1059.81,-721.62 cw(c1083.95,-721.62) R64.1@1066.88,-704.55 ; 1059.81,-721.62 cw(c1083.95,-721.62) R64.1@1066.88,-704.55 ; 1059.81,-673.34 ccw(c1083.95,-673.34) R64.1@1066.88,-690.41 ; 1059.81,-673.34 ccw(c1083.95,-673.34) R64.1@1066.88,-690.41 ; 1059.81,-673.34 ccw(c1083.95,-673.34) R64.1@1066.88,-690.41 ; 1059.81,-661.62 cw(c1083.95,-661.62) C118.2@1066.88,-644.55 ; 1059.81,-661.62 cw(c1083.95,-661.62) C118.2@1066.88,-644.55 ; 1059.81,-661.62 cw(c1083.95,-661.62) C118.2@1066.88,-644.55
  Top Layer w15: R66.2@879.81,-817.48 U25.2@979.81,-817.48 ; R66.2@885.11,-822.78 cw(c897.92,-835.59) 897.92,-817.48 ; R66.2@885.11,-822.78 cw(c897.92,-835.59) 897.92,-817.48 ; R66.2@885.11,-822.78 cw(c897.92,-835.59) 897.92,-817.48 ; R66.2@885.11,-812.18 ccw(c897.92,-799.37) 897.92,-817.48 ; R66.2@885.11,-812.18 ccw(c897.92,-799.37) 897.92,-817.48 ; R66.2@885.11,-812.18 ccw(c897.92,-799.37) 897.92,-817.48
NetC120_2: C120.2 R66.1 | length 265.7
  Top Layer w15: C120.2@824.81,-912.48 R66.1@824.81,-817.48 ; C120.2@819.51,-907.18 ccw(c806.7,-894.37) 824.81,-894.37 ; C120.2@819.51,-907.18 ccw(c806.7,-894.37) 824.81,-894.37 ; C120.2@819.51,-907.18 ccw(c806.7,-894.37) 824.81,-894.37 ; R66.1@819.51,-822.78 cw(c806.7,-835.59) 824.81,-835.59 ; R66.1@819.51,-822.78 cw(c806.7,-835.59) 824.81,-835.59 ; R66.1@819.51,-822.78 cw(c806.7,-835.59) 824.81,-835.59 ; 824.81,-894.37 ccw(c842.92,-894.37) C120.2@830.11,-907.18 ; 824.81,-894.37 ccw(c842.92,-894.37) C120.2@830.11,-907.18 ; 824.81,-894.37 ccw(c842.92,-894.37) C120.2@830.11,-907.18 ; 824.81,-835.59 cw(c842.92,-835.59) R66.1@830.11,-822.78 ; 824.81,-835.59 cw(c842.92,-835.59) R66.1@830.11,-822.78 ; 824.81,-835.59 cw(c842.92,-835.59) R66.1@830.11,-822.78
NetC121_2: C121.2 R65.2 U26.3 | length 1088.2
  Top Layer w10: U26.3@1024.81,-272.28 1067.21,-314.69 1282.01,-314.69 1321.81,-354.48 1321.81,-784.48 C121.2@1349.81,-812.48 R65.2@1289.81,-812.48 ; R65.2@1296.88,-819.55 cw(c1313.95,-836.62) 1313.95,-812.48 ; R65.2@1296.88,-819.55 cw(c1313.95,-836.62) 1313.95,-812.48 ; R65.2@1296.88,-819.55 cw(c1313.95,-836.62) 1313.95,-812.48 ; R65.2@1296.88,-805.41 ccw(c1313.95,-788.34) 1313.95,-812.48 ; R65.2@1296.88,-805.41 ccw(c1313.95,-788.34) 1313.95,-812.48 ; R65.2@1296.88,-805.41 ccw(c1313.95,-788.34) 1313.95,-812.48 ; 1325.67,-812.48 cw(c1325.67,-836.62) C121.2@1342.74,-819.55 ; 1325.67,-812.48 ccw(c1325.67,-788.34) C121.2@1342.74,-805.41 ; 1325.67,-812.48 cw(c1325.67,-836.62) C121.2@1342.74,-819.55 ; 1325.67,-812.48 ccw(c1325.67,-788.34) C121.2@1342.74,-805.41 ; 1325.67,-812.48 ccw(c1325.67,-788.34) C121.2@1342.74,-805.41 ; 1325.67,-812.48 cw(c1325.67,-836.62) C121.2@1342.74,-819.55